# Altium PCB Sampler_DIOT.PCBDOC (part 5 of 9)
Units mm, origin at the board's own origin, x right, y up, seen from the top; angles counter-clockwise.
Board outline 222.17 x 100 mm, 4 copper layers (Top, GP1(GND), L3, Bot), stack 1.672 mm thick; 664 components, 411 nets, 2128 pads, 911 vias.
Unrouted connection lines stored in the file: 4.
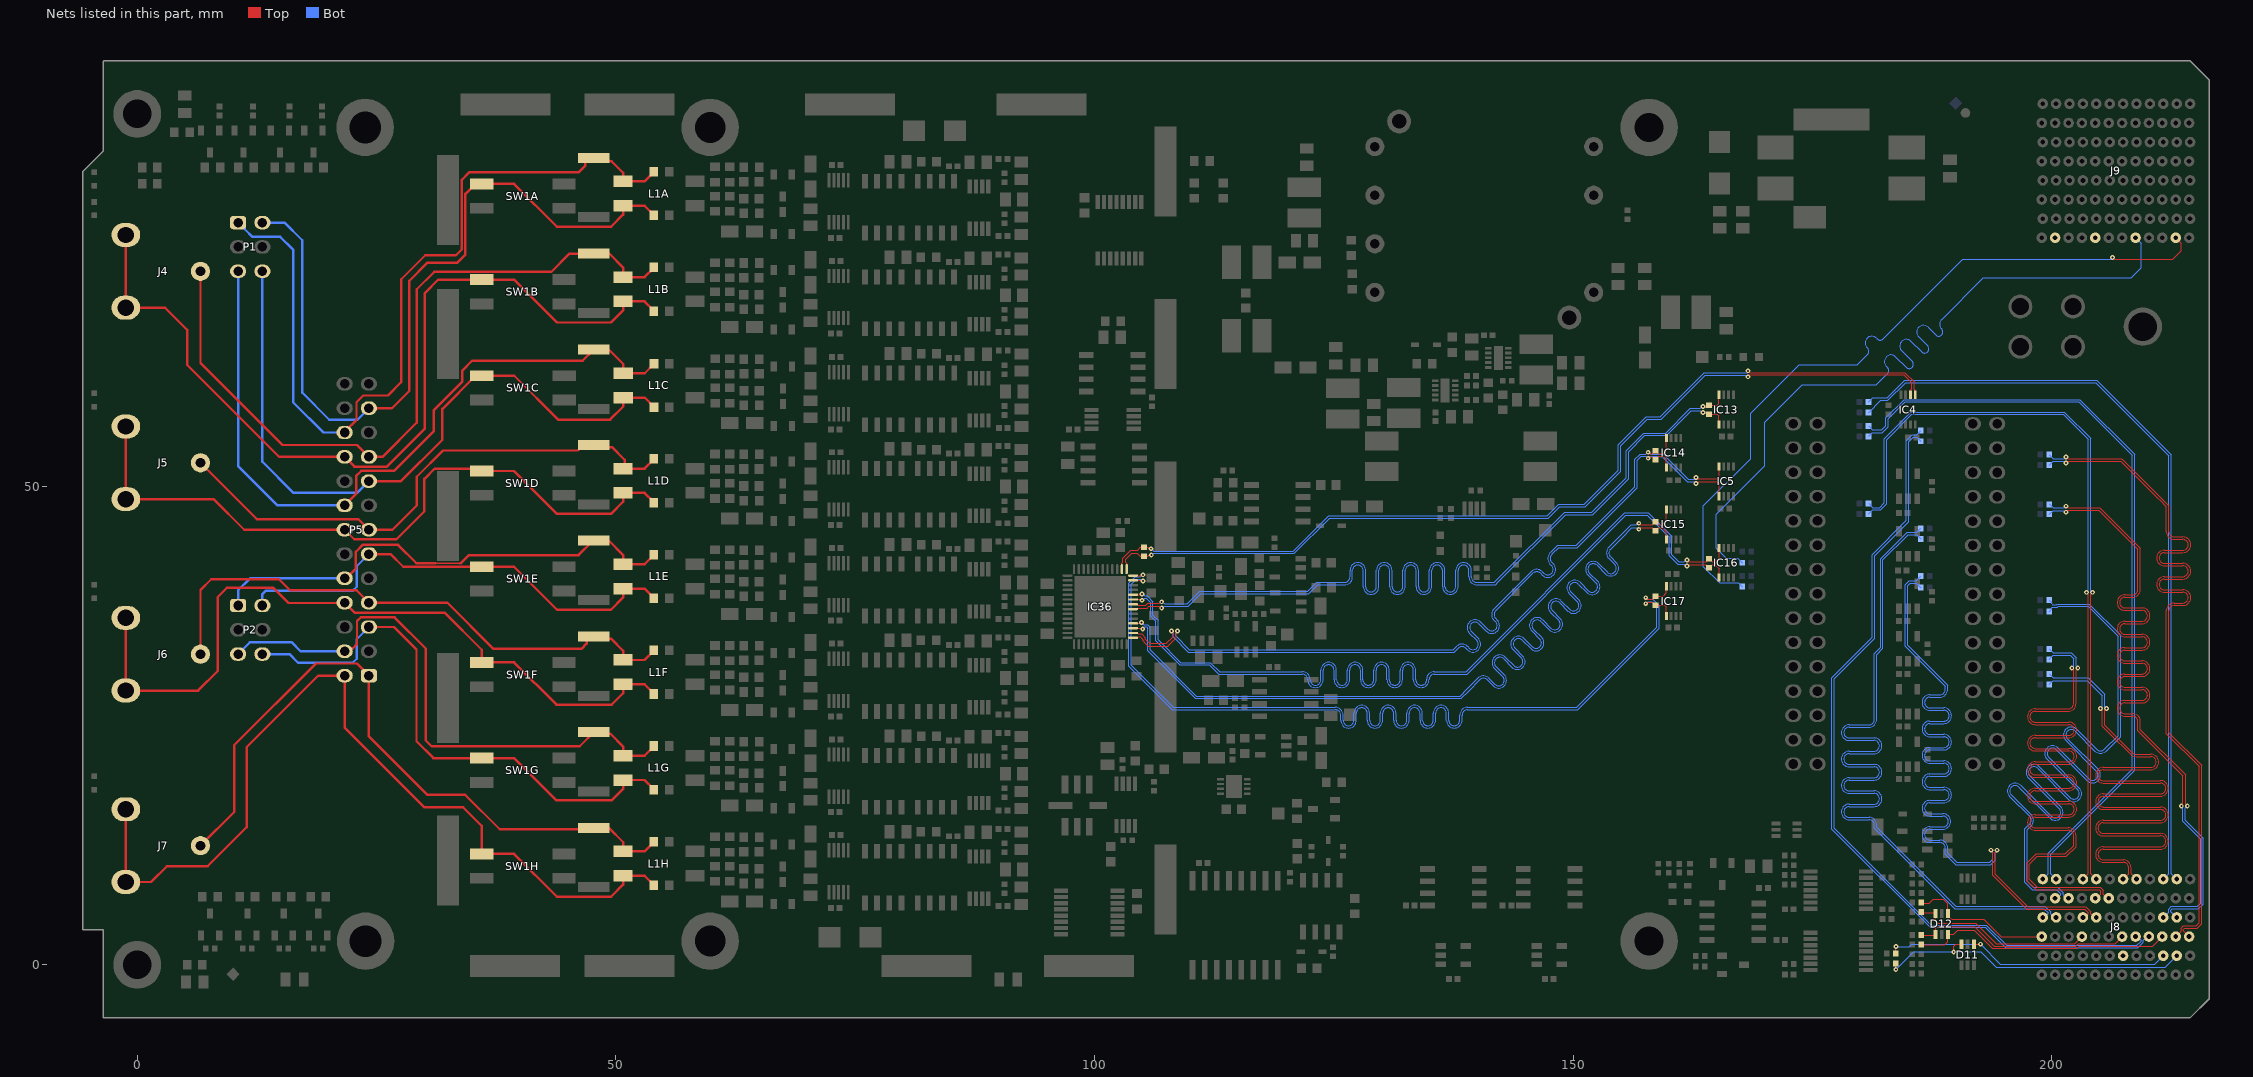
[diagram p5: the nets of this part, all layers, seen from the top]

## Via types
v1: diameter 0.5, hole 0.2, Top to Bot, tented both sides, 878 vias
v2: diameter 1, hole 0.6, Top to Bot, tented both sides, 18 vias
v3: diameter 0.6, hole 0.3, Top to Bot, tented both sides, 13 vias
v4: diameter 1.27, hole 0.711, Top to Bot, tented both sides, 2 vias

## Nets (pads, with @x,y where several pads share a name; then routed paths per layer and width w, separated by ;. In a path a pad name is that pad's centre, name@x,y a point inside that pad or via, vN(x,y) a via of type N, cw(c..) or ccw(c..) an arc to the next point about the centre after c; other vN are vias at no path point) (continued)
BP_IO.LVDS_P6: (continued)
  Top w0.127: v1(202.741,31) 202.554,30.813 202.554,30.617 202.55,30.613 202.55,29.597 202.55,27.301 cw(c201.732,27.301) 201.732,26.483 198.296,26.483 ccw(c198.296,25.92) 197.733,25.92 ccw(c198.296,25.92) 198.296,25.356 201.794,25.356 cw(c201.794,24.539) 202.611,24.539 cw(c201.794,24.539) 201.794,23.721 198.296,23.721 ccw(c198.296,23.158) 197.733,23.158 ccw(c198.296,23.158) 198.296,22.594 201.794,22.594 cw(c201.794,21.777) 202.611,21.777 cw(c201.794,21.777) 201.794,20.959 198.296,20.959 ccw(c198.296,20.396) 197.733,20.396 ccw(c198.296,20.396) 198.296,19.832 201.794,19.832 cw(c201.794,19.015) 202.611,19.015 cw(c201.794,19.015) 201.794,18.197 198.296,18.197 ccw(c198.296,17.634) 197.733,17.634 ccw(c198.296,17.634) 198.296,17.07 201.794,17.07 cw(c201.794,16.253) 202.611,16.253 cw(c201.794,16.253) 201.794,15.435 198.296,15.435 ccw(c198.296,14.872) 197.733,14.872 ccw(c198.296,14.872) 198.296,14.308 201.732,14.308 cw(c201.732,13.491) 202.55,13.491 202.55,13.3 202.55,12.35 201.525,11.325 198.48,11.325 197.655,10.5 197.655,8.91 198.476,8.09 205.069,8.09 205.383,7.776 205.383,7.395 205.828,6.95 J8.G5@205.969,6.95
  Bot w0.127: R128.1@199.77,33 200.191,32.579 202.03,32.579 202.554,32.055 202.554,31.187 v1(202.741,31)
BP_IO.LVDS_P7: J8.E6 R129.1 | length 79
  Top w0.127: v1(205.736,26.775) 205.554,26.593 205.554,25.046 206.395,24.205 208.429,22.171 ccw(c208.827,22.57) 208.827,22.006 210.367,22.006 cw(c210.367,21.189) 211.184,21.189 cw(c210.367,21.189) 210.367,20.371 205.406,20.371 ccw(c205.406,19.808) 204.843,19.808 ccw(c205.406,19.808) 205.406,19.244 211.372,19.244 cw(c211.372,18.427) 212.19,18.427 cw(c211.372,18.427) 211.372,17.609 205.406,17.609 ccw(c205.406,17.046) 204.843,17.046 ccw(c205.406,17.046) 205.406,16.482 211.372,16.482 cw(c211.372,15.665) 212.19,15.665 cw(c211.372,15.665) 211.372,14.847 205.406,14.847 ccw(c205.406,14.284) 204.843,14.284 ccw(c205.406,14.284) 205.406,13.72 211.372,13.72 cw(c211.372,12.903) 212.19,12.903 cw(c211.372,12.903) 211.372,12.085 205.406,12.085 ccw(c205.406,11.522) 204.843,11.522 ccw(c205.406,11.522) 205.406,10.958 207.479,10.958 cw(c207.479,10.141) 208.296,10.141 208.296,9.95 208.296,9.523 J8.E6@208.869,8.95
  Bot w0.127: R129.1@199.77,30.4 200.168,30.002 203.83,30.002 205.575,28.258 205.575,26.936 v1(205.736,26.775)
BP_IO.LVDS_P8: J8.B6 R130.1 | length 80.4
  Bot w0.127: R130.1@180.87,58.8 181.317,59.247 182.822,59.247 184.637,61.062 204.738,61.062 212.496,53.304 212.496,51.764 212.496,11.5 212.496,9.523 J8.B6@213.069,8.95
BP_IO.LVDS_P9: J8.K6 R131.1 | length 80.4
  Bot w0.127: R131.1@180.87,56.3 181.287,55.883 182.233,55.883 182.69,56.34 182.69,57.154 184.59,59.054 202.946,59.054 208.661,53.339 208.661,50.78 208.661,35.9 208.661,20.316 199.898,11.553 199.898,9.521 J8.K6@200.469,8.95
BP_IO.LVDS_P10: J8.H6 R132.1 | length 79
  Top w0.127: v1(204.275,38.913) 204.096,38.734 204.096,9.523 J8.H6@204.669,8.95
  Bot w0.127: R132.1@180.87,48.2 181.295,47.775 182.025,47.775 182.5,48.25 182.5,54.95 185.301,57.751 201.324,57.751 204.089,54.986 204.089,51.007 204.089,40.55 204.089,39.1 v1(204.275,38.913)